# Altium PCB PCB.PcbDoc
Units mm, origin at the board's own origin, x right, y up, seen from the top; angles counter-clockwise.
Board outline 39.7 x 41.65 mm, 2 copper layers (Top Layer, Bottom Layer); 13 components, 7 nets, 34 pads, 164 vias.
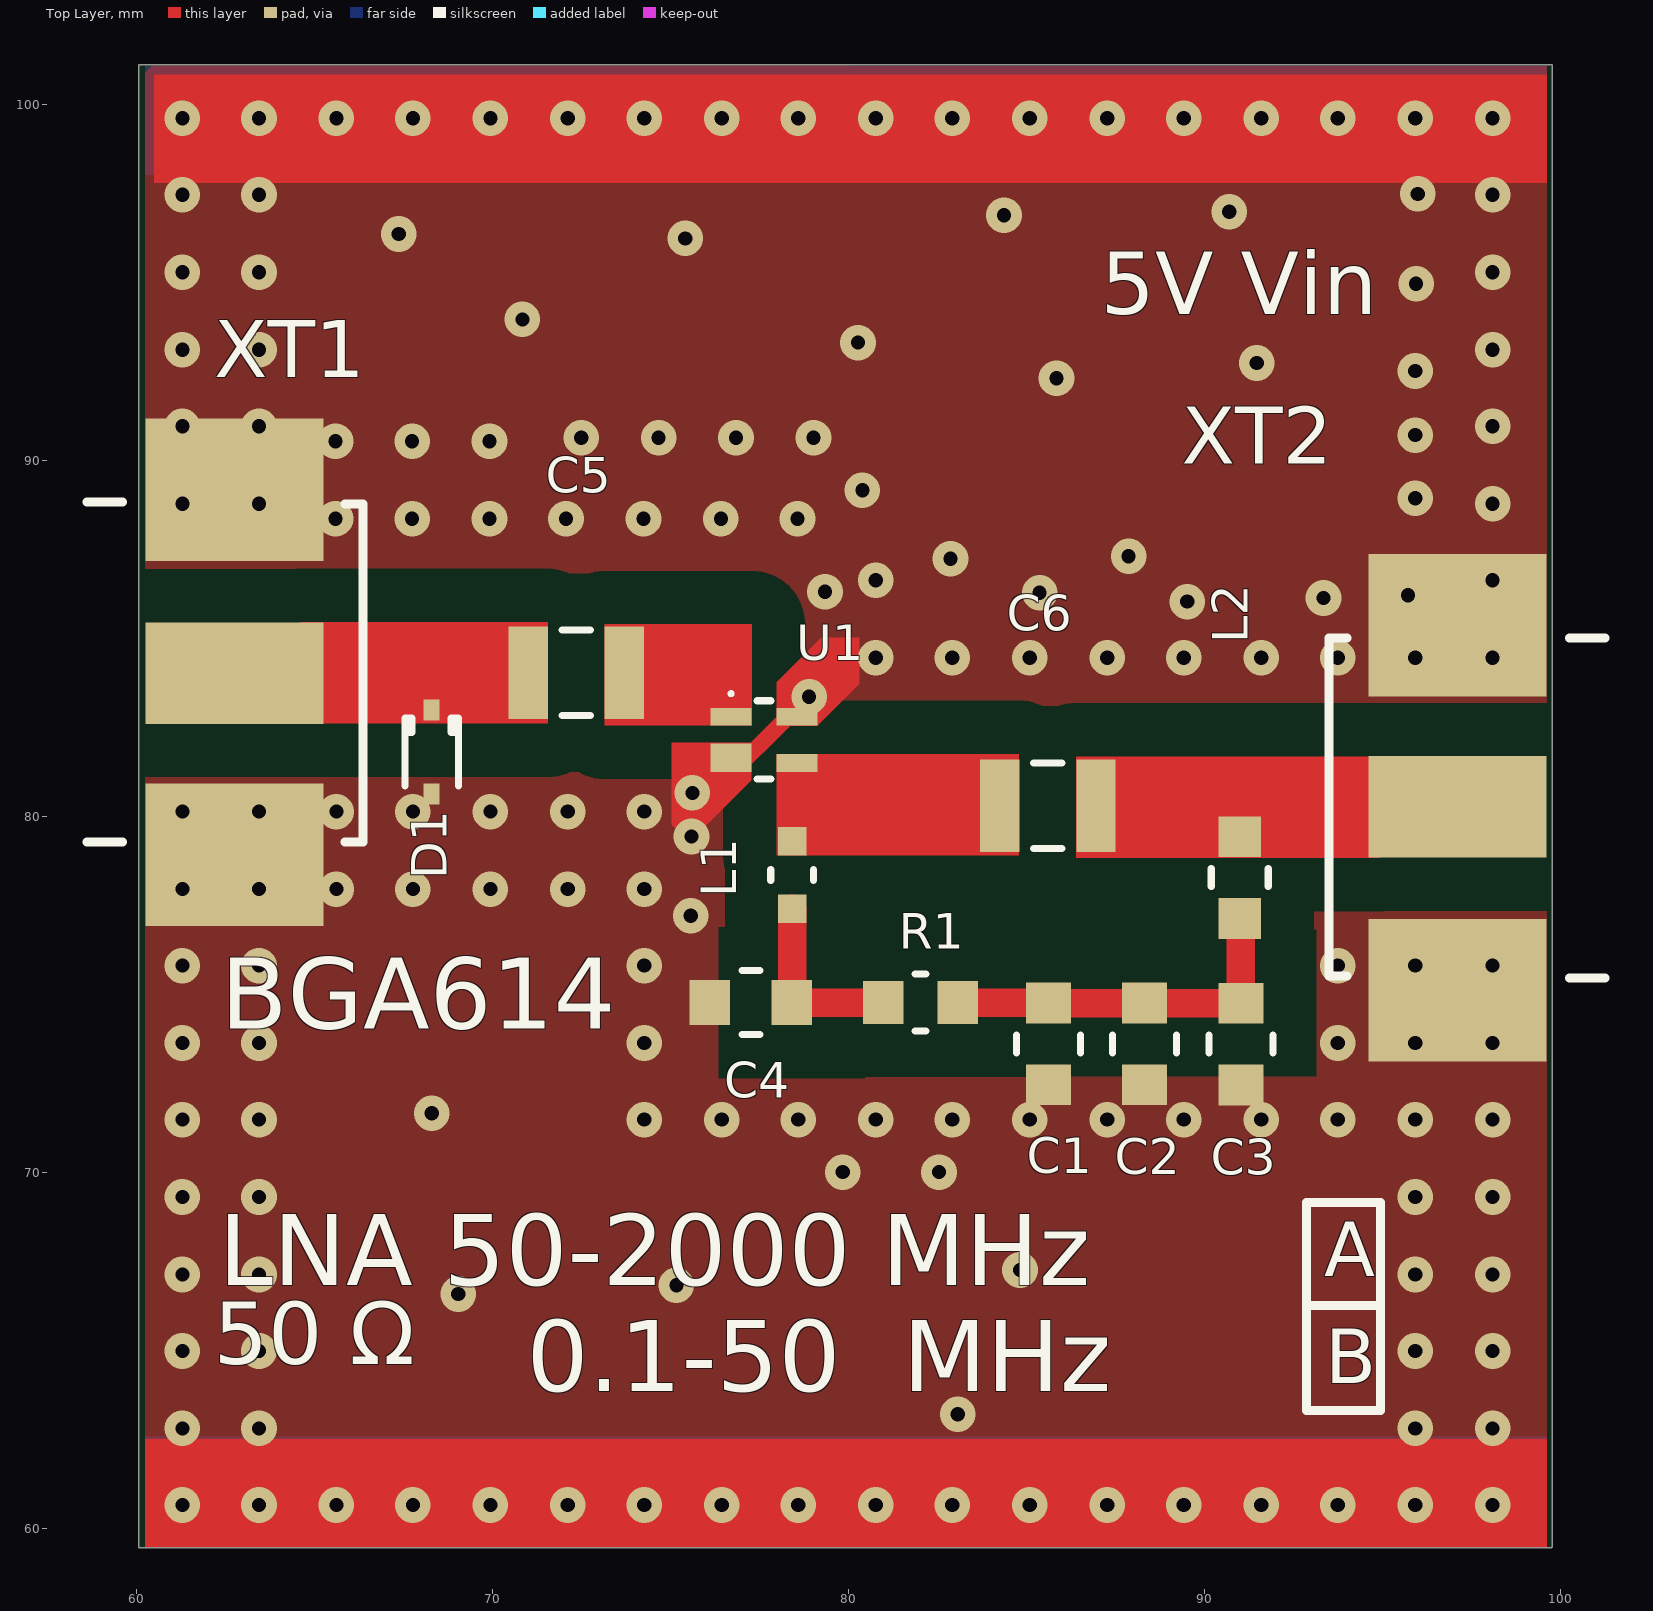
[diagram p0: Top Layer view]
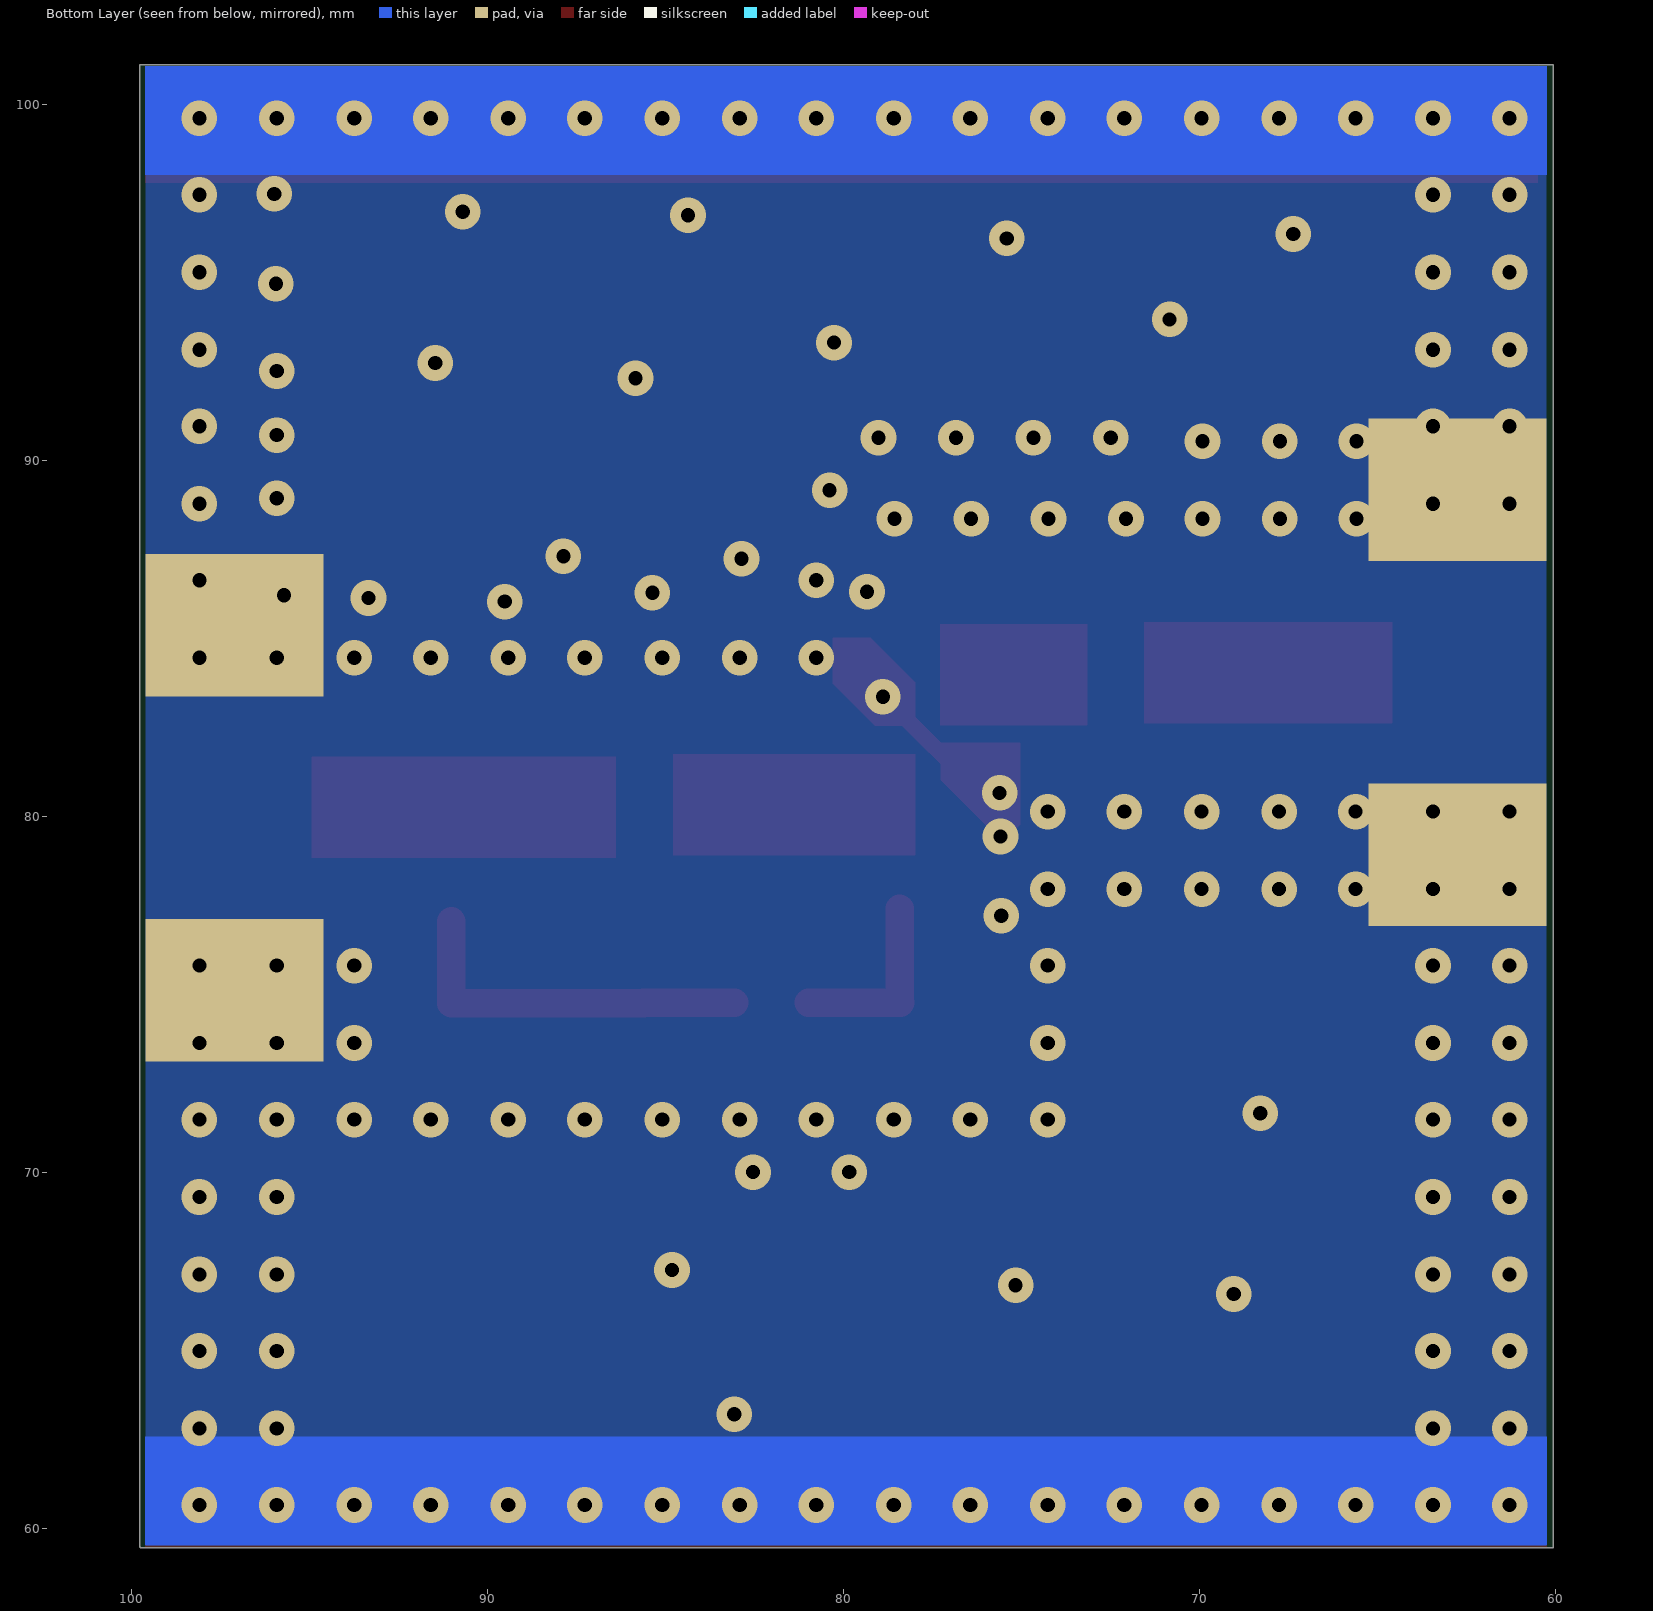
[diagram p1: Bottom Layer view, seen from below]
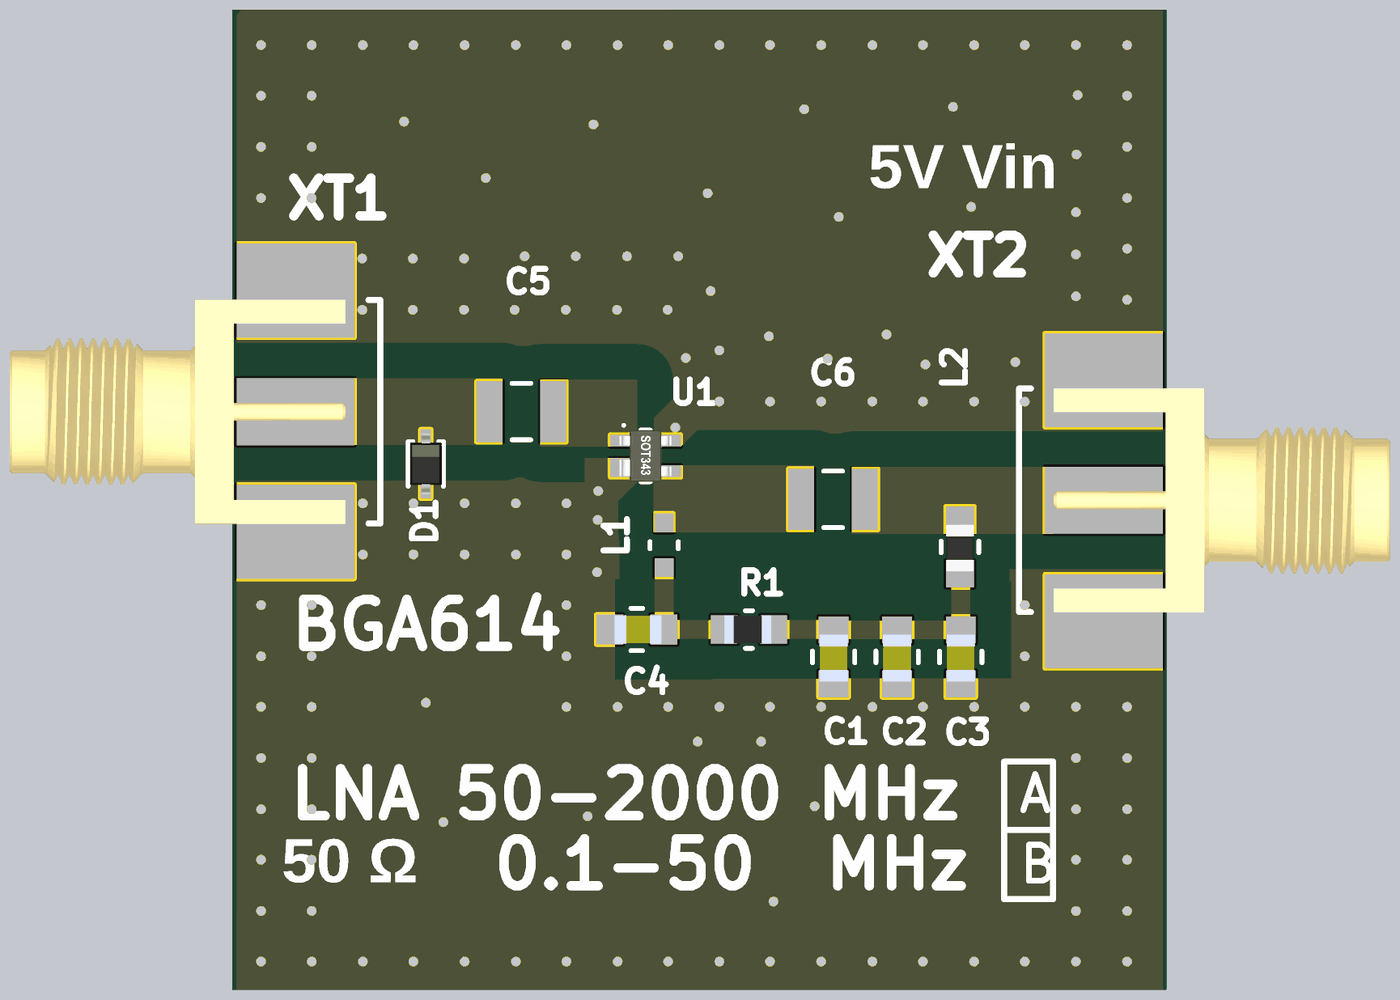
[diagram p2: 3D render of the assembled board from above, using the file's embedded part models]

## Layer stack, top to bottom
Top Solder: solder mask 0.0102, Solder Resist, Dk 3.5
Top Layer: signal copper 0.0356
Dielectric 1: dielectric 0.32, FR-4, Dk 4.8
Bottom Layer: signal copper 0.0356
Bottom Solder: solder mask 0.0102, Solder Resist, Dk 3.5

## Board outline
60.075,101.1 60.075,59.45 99.75,59.45 99.775,59.475 99.775,101.1

## Design rules (kind name [scope] priority, off if disabled: settings)
Clearance [All] p1: gap=0.4 ignorepadtopadclearanceinfootprint=TRUE except(1.5: SMDPad-Fill SMDPad-Poly SMDPad-Region Fill-Fill Fill-Poly Fill-Region Poly-Poly Poly-Region Region-Region)
PlaneConnect [All] p1: planeconnectstyle=Direct reliefexpansion=0.508 reliefentries=4 reliefconductorwidth=0.254 reliefairgap=0.254
PolygonConnect [All] p1: connectstyle=Direct reliefconductorwidth=0.254 reliefentries=4 polygonreliefangle="90 Angle" airgapwidth=0.254
RoomDefinition lna [InComponentClass('lna')] p1 off: confinementstyle=ConfineIn formatcopy=TRUE lockcomponents=FALSE outline 55.87,28.954 133.975,28.954 133.975,47.75 55.87,47.75
RoutingVias [All] p1: holewidth=0.4 width=1 viastyle="Through Hole" minholewidth=0.4 minwidth=1 maxholewidth=0.4 maxwidth=1
SolderMaskExpansion [All] p1: expansion=0.102
Width [All] p1: maxlimit=3 minlimit=0.4 preferedwidth=0.8 impedancedriven=TRUE minimp=50.000000 maximp=50.000000 favimp=50.000000
29 further rules are at their usual default settings.

## Components (designator, comment, footprint, x,y, rotation, side; value= is the part's Value field where it differs from the comment)
C1 "CAP_NPOL" C0805 88.326,74.549 r270 top value=100pF
C2 "CAP_NPOL" C0805 85.629,74.549 r270 top value=1nF
C3 "CAP_NPOL" C0805 91.031,74.547 r270 top value=10nF
C4 "CAP_NPOL" C0805 76.315,74.761 r0 top value=NC
C5 "CAP_NPOL" C1210 72.362,84.024 r0 top value=1nF
C6 "CAP_NPOL" C1210 85.606,80.294 r0 top value=1nF
D1 "NC" SOD-323 68.3,81.8 r90 top
L1 "IND_WO_IRON" IND0603 78.426,77.392 r90 top value=270nH
L2 "IND_W_IRON" IND0805 90.997,77.323 r90 top value=1uH
R1 "68" R0805 82.979,74.761 r180 top
U1 "BGA614" SOT-343 77.635,82.139 r0 top locked
XT1 "COAX-F" SMA-16 62.866,84.018 r0 top locked
XT2 "COAX-F" SMA-16 97.011,80.256 r180 top locked

## Footprints (in the part's own frame and the unit in brackets; to place one, negate y for a bottom-side part, rotate by r counter-clockwise, add the part's x,y. Pads: shape width x height; smd on the part's side, far side on the other; paste and mask are expansions set on the pad)
C0805 [mm]
  rect 1.14x1.27 smd: 1(2.1,0) 2(-0.2,0)
  silkscreen extent 0.7,-0.9 1.2,0.9, body extent 0,-0.6 2,0.6, height 0.9
C1210 [mm] "Chip Capacitor, Body 3.2x2.5mm, IPC High Density"
  rect 1.1x2.6 smd: 1(-1.35,0) 2(1.35,0)
  silkscreen extent -0.4,-1.2 0.4,1.2, body extent -1.7,-1.35 1.7,1.35, height 1.3
IND0603 [mm]
  rect 0.8x0.8 smd: 1(1.905,0) 2(0,0)
  silkscreen extent 0.8,-0.6 1.1,0.6
IND0805 [mm]
  rect 1.14x1.2 smd: 1(2.1,0) 2(-0.2,0)
  silkscreen extent 0.7,-0.8 1.2,0.8, body extent -0.1,-0.6 1.9,0.6, height 0.95
R0805 [mm]
  rect 1.14x1.2 smd: 1(2,0) 2(-0.1,0)
  silkscreen extent 0.79,-0.8 1.1,0.8, body extent 0,-0.6 2,0.6, height 0.5
SMA-16 [mm] "Edge female socket SMA"
  rect 5x2.85 smd: 1(-0.1,0)
  rect 5x4 smd: 2(-0.1,-5.1) 2(-0.1,5.15)
  rect 5x4 smd far side: 2(-0.1,-5.1) 2(-0.1,5.15)
  silkscreen extent -4.25,-4.75 3.5,4.8, body extent -12.25,-4.76 2.03,4.76, height 4.32
SOD-323 [mm]
  rect 0.59x0.45 smd: 1(-1.175,0) 2(1.175,0)
  silkscreen extent -0.95,-0.75 0.95,0.75, body extent -1.3,-0.68 1.3,0.67, height 1.1
SOT-343 [mm] "SOT343, 4-Leads, Body 2x1.3 mm, Pitch 1.3mm, Lead Span 2.1mm, IPC Medium Density"
  rect 1.15x0.5 smd: 1(-0.925,0.65) 3(0.925,-0.65) 4(0.925,0.65)
  rect 1.15x0.8 smd: 2(-0.925,-0.5)
  silkscreen extent -0.97,-1.1 0.2,1.35, body extent -1.1,-1.1 1.1,1.1, height 1

## Part data
D1: library part TVS_BIDIR, "TVS Diodes"
R1: library part RESISTOR, "RES"
U1: "Silicon Germanium Broadband MMIC Amplifier"
XT1 XT2: "RF Coaxial PCB Connector, MCX; Thru-Hole, Right-Angle Mount Socket, Blunt Post Terminal, 50 Ohm Impedance", PackageDocument=04-Jul-1999, ComponentLink1Description="Manufacturer Link", ComponentLink1URL=http://www.amphenolrf.com/, DatasheetDocument=30-May-2003, DrillSize="Corresponds to nominal value.", LatestRevisionDate=15-Jul-2004, LatestRevisionNote="Component Replaced.", PackageReference=919-119J-51AX, PCB_Layout="Complies with manufacturer's recommendation.", Published=15-Jul-2004, Publisher="Altium Limited"

## Via types
v1: diameter 1, hole 0.4, Top Layer to Bottom Layer, tented both sides, 164 vias

## Nets (pads, with @x,y where several pads share a name; then routed paths per layer and width w, separated by ;. In a path a pad name is that pad's centre, name@x,y a point inside that pad or via, vN(x,y) a via of type N, cw(c..) or ccw(c..) an arc to the next point about the centre after c; other vN are vias at no path point)
GND: C1.1 C2.1 C3.1 C4.2 D1.1 U1.2 U1.4 XT1.2 XT2.2
  other v1: 61.3,60.65 63.45,60.65 65.625,60.65 67.775,60.65 69.95,60.65 72.125,60.65 74.275,60.65 76.45,60.65 78.6,60.65 80.775,60.65 82.925,60.65 85.1,60.65 87.275,60.65 89.425,60.65 91.6,60.65 93.75,60.65 95.925,60.65 98.1,60.65 61.3,62.8 63.45,62.8 95.925,62.8 98.1,62.8 83.075,63.2 61.3,64.975 63.45,64.975 95.925,64.975 98.1,64.975 69.05,66.575 75.175,66.825 61.3,67.125 63.45,67.125 95.925,67.125 98.1,67.125 84.825,67.25 61.3,69.3 63.45,69.3 95.925,69.3 98.1,69.3 79.85,70 82.55,70 61.3,71.475 63.45,71.475 74.275,71.475 76.45,71.475 78.6,71.475 80.775,71.475 82.925,71.475 85.1,71.475 87.275,71.475 89.425,71.475 91.6,71.475 93.75,71.475 95.925,71.475 98.1,71.475 68.3,71.65 61.3,73.625 63.45,73.625 74.275,73.625 93.75,73.625 95.925,73.625 98.1,73.625 61.3,75.8 63.45,75.8 74.275,75.8 93.75,75.8 95.925,75.8 98.1,75.8 75.575,77.2 61.3,77.95 63.45,77.95 65.625,77.95 67.775,77.95 69.95,77.95 72.125,77.95 74.275,77.95 75.6,79.425 61.3,80.125 63.45,80.125 65.625,80.125 67.775,80.125 69.95,80.125 72.125,80.125 74.275,80.125 75.625,80.65 78.902,83.349 80.775,84.45 82.925,84.45 85.1,84.45 87.275,84.45 89.425,84.45 91.6,84.45 93.75,84.45 95.925,84.45 98.1,84.45 89.525,86.025 93.35,86.125 95.725,86.2 85.375,86.275 79.35,86.3 80.775,86.625 98.1,86.625 82.875,87.225 87.875,87.3 65.6,88.35 67.75,88.35 69.925,88.35 72.075,88.35 74.25,88.35 76.425,88.35 78.575,88.35 61.3,88.775 63.45,88.775 98.1,88.775 95.925,88.925 80.4,89.15 65.6,90.525 67.75,90.525 69.925,90.525 72.5,90.625 74.675,90.625 76.85,90.625 79.025,90.625 95.925,90.7 61.3,90.95 63.45,90.95 98.1,90.95 85.85,92.3 95.925,92.5 91.475,92.725 61.3,93.1 63.45,93.1 98.1,93.1 80.275,93.3 70.85,93.95 95.95,94.95 61.3,95.275 63.45,95.275 98.1,95.275 75.425,96.225 67.375,96.35 84.375,96.875 90.7,96.975 61.3,97.45 63.45,97.45 98.1,97.45 96,97.475 61.3,99.6 63.45,99.6 65.625,99.6 67.775,99.6 69.95,99.6 72.125,99.6 74.275,99.6 76.45,99.6 78.6,99.6 80.775,99.6 82.925,99.6 85.1,99.6 87.275,99.6 89.425,99.6 91.6,99.6 93.75,99.6 95.925,99.6 98.1,99.6
IN: C5.1 D1.2 XT1.1
NetC1_2: C1.2 C2.2 C3.2 L2.2 R1.2 | length 10.3
  Top Layer w0.8: R1.2 85.617,74.761 C2.2 85.631,74.747 C3.2 L2.2@91.031,77.052
NetC4_1: C4.1 L1.2 R1.1 | length 5.2
  Top Layer w0.8: L1.2 78.426,74.772 C4.1 R1.1
NetC5_2: C5.2 U1.1
NetC6_1: C6.1 L1.1 U1.3
OUT: C6.2 L2.1 XT2.1

## Polygon pours and split planes (outlines as drawn)
GND on Bottom Layer "Bottom-GND" (solid, remove dead copper, pour order 2): 60.275,101.075 60.275,59.5 99.6,59.5 99.6,101.05
GND on Top Layer "Top-GND" (solid, remove dead copper, pour order 0): 60.257,101.09 60.257,59.515 99.622,59.515 99.622,101.065

## Other copper
Top Layer:
  rectangle net GND: 60.25,59.45 99.625,62.5
  rectangle net GND: 60.5,97.775 99.625,100.825
  rectangle net OUT: 86.398,78.827 94.952,81.677
  rectangle net NetC6_1: 77.981,78.89 84.804,81.74
  rectangle net IN: 64.582,82.597 71.566,85.447
  rectangle net NetC5_2: 73.161,82.538 77.294,85.388
  region net GND: 77.261,82.055 78,82.794 78,82.9 78.449,82.9 78.561,82.788 78.561,82.542 78.367,82.542 76.825,81 76.8,81.025 76.8,81.925
  region net GND: 77.987,82.543 77.987,83.755 79.246,85.014 80.305,85.014 80.305,83.711 79.135,82.541
  region net GND: 77.278,82.038 77.261,82.055 75.048,82.055 75.048,79.763 75.541,79.27 77.278,81.007
Bottom Layer:
  rectangle net GND: 60.25,59.525 99.625,62.575
  rectangle net GND: 60.25,98 99.625,101.075

## Silkscreen, mask and mechanical layers (free items; w line width, h text height)
Top Overlay:
  lines w0.254: 92.875,66.25 94.925,66.25 ; 92.875,63.3 92.875,69.15 94.95,69.15 94.95,63.3 92.875,63.3
  text "5V Vin" at 87.1,93.525 h3
  text "BGA614" at 62.375,74.025 h2
  text "A" at 93.375,67.075 h1.52
  text "LNA 50-2000 MHz" at 62.325,66.825 h2
  text "B" at 93.4,64.075 h1.52
  text "50 Ω" at 62.175,64.025 h3
  text "0.1-50  MHz" at 70.975,63.85 h2
Mechanical 1:
  lines w0.254: 59.944,101.219 59.944,59.309 99.879,59.309 99.879,101.219 ; 59.95,101.225 99.875,101.225